# Altium PCB TempPCB.PcbDoc
Units mil, origin at the board's own origin, x right, y up, seen from the top; angles counter-clockwise.
Board outline 2285 x 1133.39 mil, 2 copper layers (Top Layer, Bottom Layer); 5 components, 7 nets, 31 pads, 0 vias.
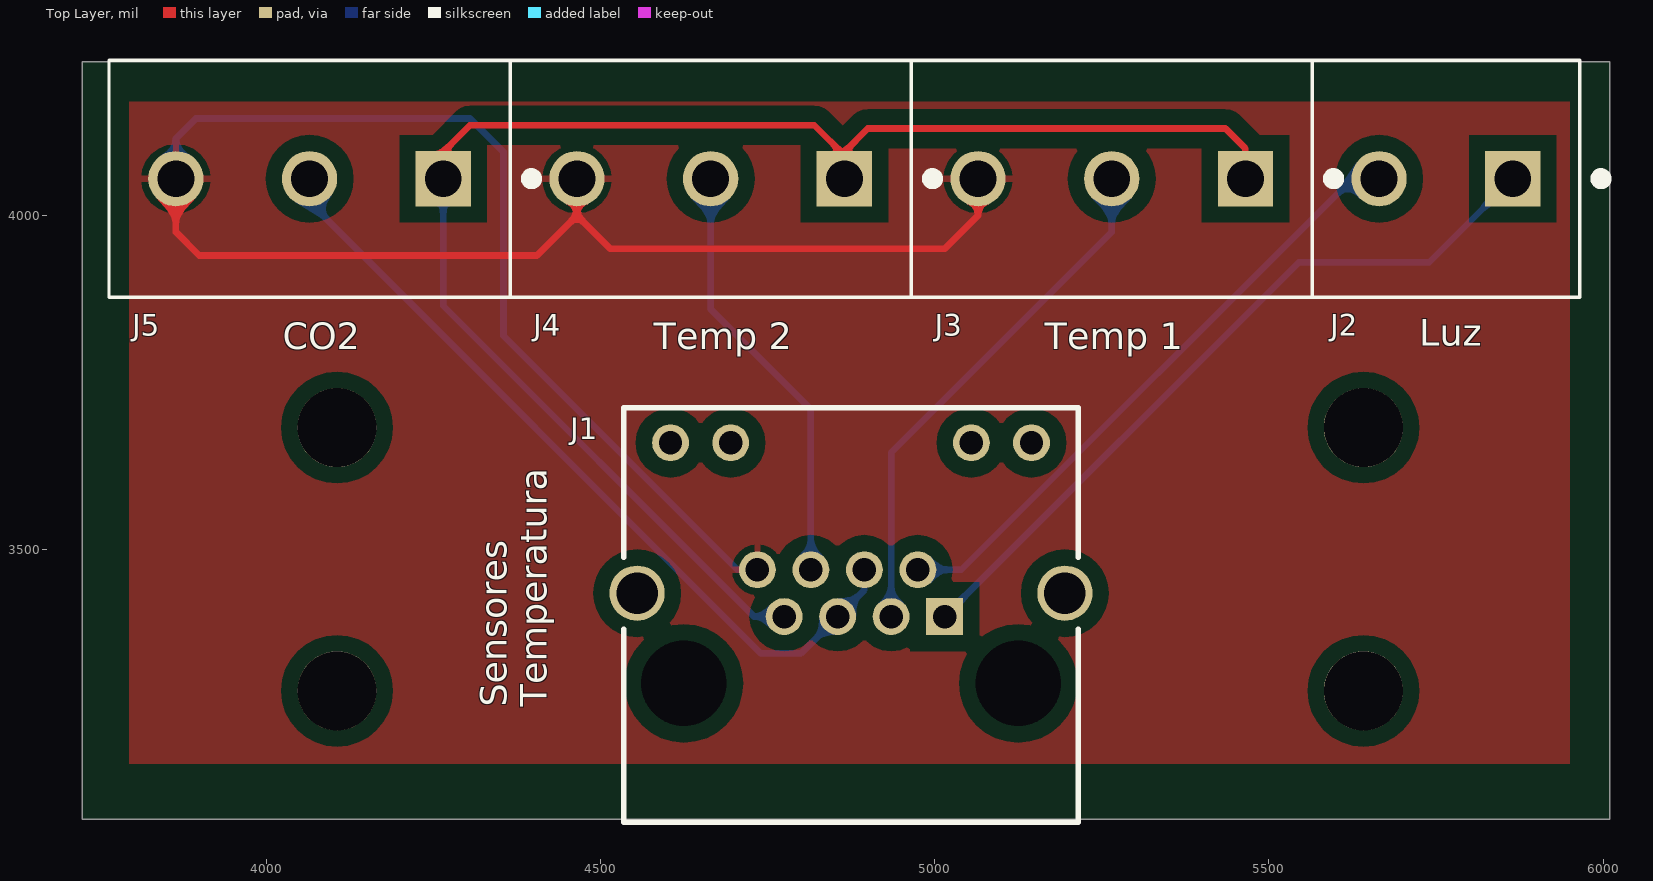
[diagram p0: Top Layer view]
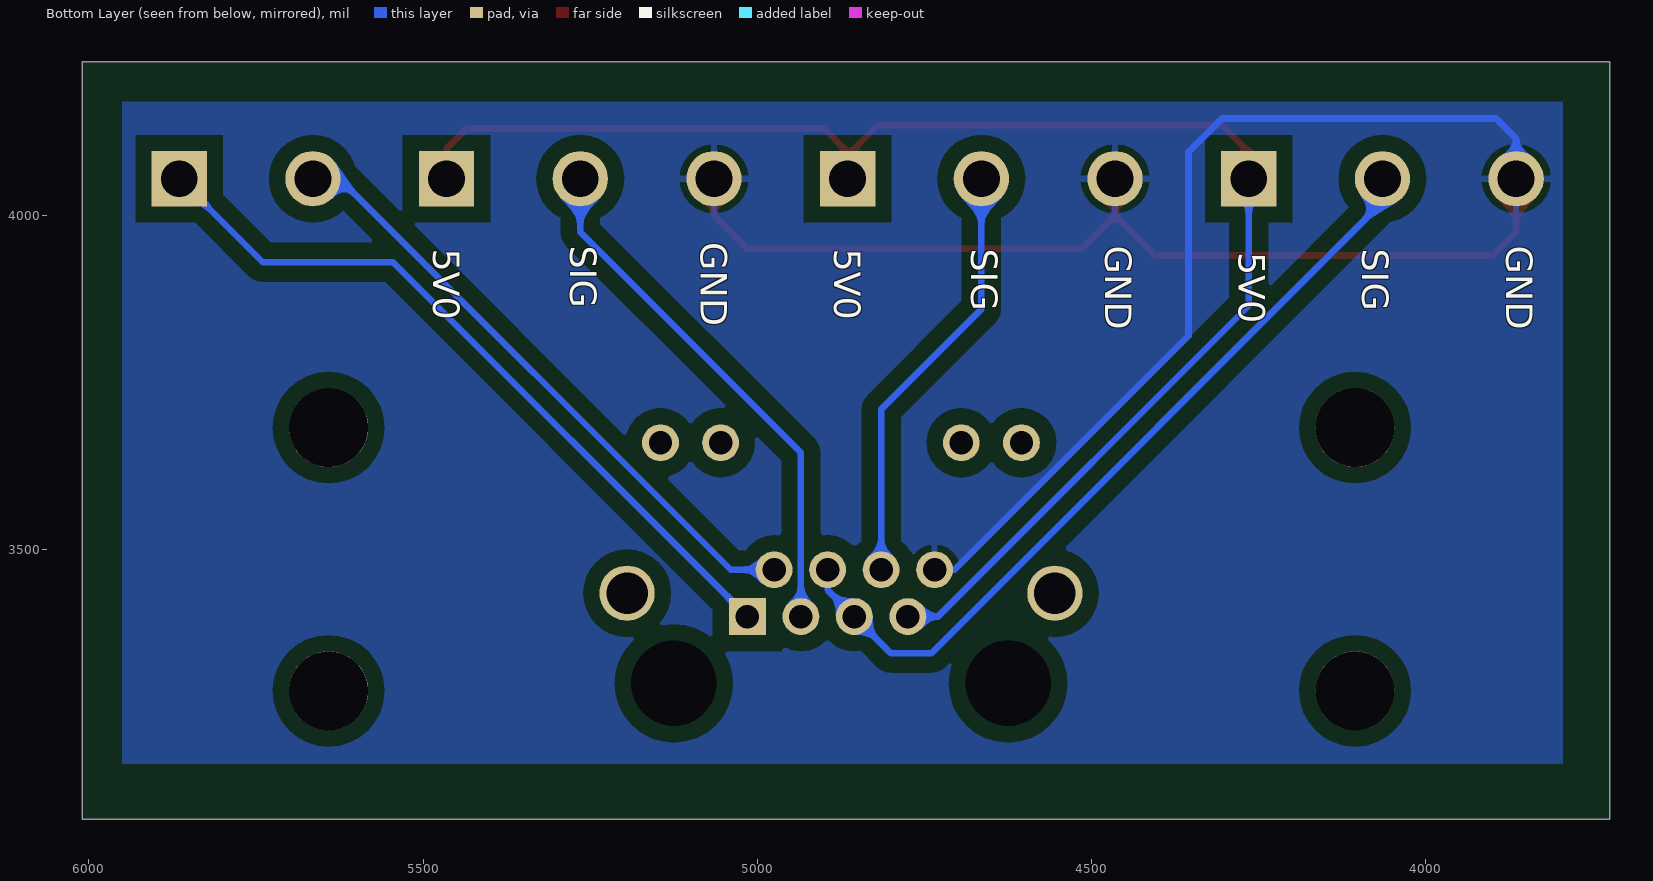
[diagram p1: Bottom Layer view, seen from below]
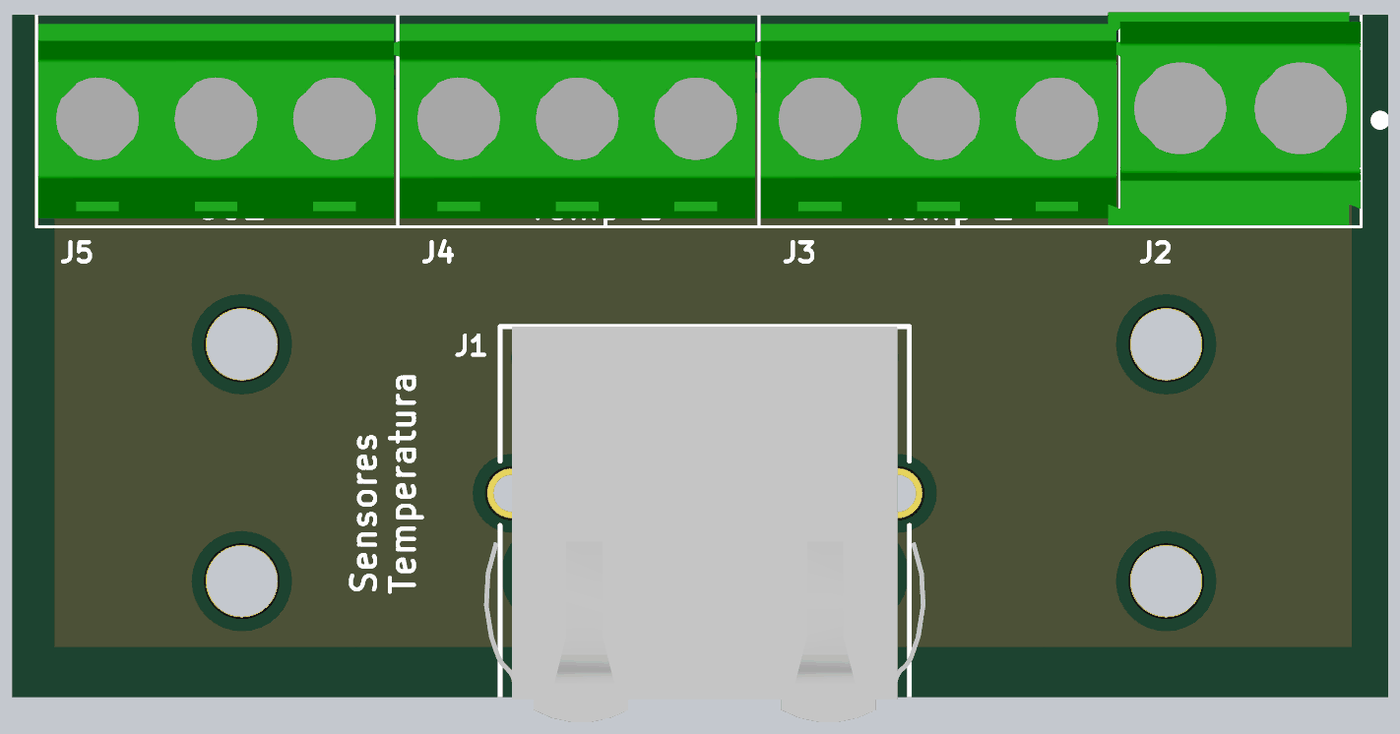
[diagram p2: 3D render of the assembled board from above, using the file's embedded part models]

## Layer stack, top to bottom
Top Solder: solder mask 0.4, Solder Resist, Dk 3.5
Top Layer: signal copper 1.4
Dielectric 1: dielectric 12.6, FR-4, Dk 4.8
Bottom Layer: signal copper 1.4
Bottom Solder: solder mask 0.4, Solder Resist, Dk 3.5

## Board outline
3725,3096.61 3725,4230 6010,4230 6010,3096.61

## Design rules (kind name [scope] priority, off if disabled: settings)
Clearance [All] p1: gap=6 except(24: Arc-Poly Track-Poly SMDPad-Poly THPad-Poly Via-Poly Fill-Poly Poly-Poly)
DiffPairsRouting [All] p1: maxlimit=10 minlimit=10 mostfreqgap=10 toplayer_minwidth=10 toplayer_maxwidth=15 toplayer_prefwidth=15 bottomlayer_minwidth=10 bottomlayer_maxwidth=15 bottomlayer_prefwidth=15 maxuncoupledlength=500
HoleSize [All] p1: absolutevalues=TRUE maxlimit=300 minlimit=1 maxpercent=80.000 minpercent=20.000
MinimumSolderMaskSliver [All] p1: minsoldermaskwidth=0
PlaneClearance [All] p1: clearance=32
PolygonConnect [All] p1: connectstyle=Relief reliefconductorwidth=10 reliefentries=4 polygonreliefangle="90 Angle" airgapwidth=10
RoutingTopology [All] p1: topology=Daisy_Simple
RoutingVias [All] p1: holewidth=28 width=50 viastyle="Through Hole" minholewidth=28 minwidth=50 maxholewidth=40 maxwidth=60
SilkToSilkClearance [All] p1: silktosilkclearance=0
SilkToSolderMaskClearance [IsPad] p1: minsilkscreentomaskgap=0 clearancetoexposedcopper=TRUE
SolderMaskExpansion SolderMaskExpansion_1 [IsVia] p1: expansion=0 soldermaskfromhole=TRUE
SolderMaskExpansion [All] p2: expansion=4
UnpouredPolygon [All] p1: allowunpoured=TRUE allowshelved=TRUE
Width [All] p1: maxlimit=40 minlimit=8 preferedwidth=16
22 further rules are at their usual default settings.

## Components (designator, comment, footprint, x,y, rotation, side; value= is the part's Value field where it differs from the comment)
J1 "2-406549-1" TECO-2-406549-1_V 4875,3435 r0 top
J2 "282841-2" TE_282841-2 5765,4055 r180 top
J3 "282841-3" TE_282841-3 5265,4055 r180 top
J4 "282841-3" TE_282841-3 4665,4055 r180 top
J5 "282841-3" TE_282841-3 4065,4055 r180 top

## Footprints (in the part's own frame and the unit in brackets; to place one, negate y for a bottom-side part, rotate by r counter-clockwise, add the part's x,y. Pads: shape width x height; smd on the part's side, far side on the other; paste and mask are expansions set on the pad)
TE_282841-2 [mm]
  rect 2.1x2.1 hole 1.4: 1(-2.54,0)
  round 2.1 hole 1.4: 2(2.54,0)
  silkscreen extent -6.09,-4.5 5.08,4.5, body extent -5.08,-4.55 5.58,4.45, height 15.21
TE_282841-3 [mm]
  rect 2.1x2.1 hole 1.4: 1(-5.08,0)
  round 2.1 hole 1.4: 2(0,0) 3(5.08,0)
  silkscreen extent -8.63,-4.5 7.62,4.5, body extent -8.05,-4.06 7.55,4.14, height 10.01
TECO-2-406549-1_V [mm] "Connector, 12-Leads, Body 17.27x15.75mm, Pitch 1.016mm"
  rect 1.4x1.4 hole 0.89: 1(3.556,-0.889)
  round 1.4 hole 0.89: 2(2.54,0.889) 3(1.524,-0.889) 4(0.508,0.889) 5(-0.508,-0.889) 6(-1.524,0.889) 7(-2.54,-0.889) 8(-3.556,0.889) 9(-4.572,5.715) 10(-6.858,5.715) 11(6.858,5.715) 12(4.572,5.715)
  round 0 hole 3.251 unplated: MH1(6.35,-3.429) MH2(-6.35,-3.429)
  round 2.1 hole 1.575: S1(8.128,0) S2(-8.128,0)
  silkscreen extent -8.63,-8.71 8.64,7.04, body extent -9.32,-9.68 9.32,7.04, height 14.61

## Part data
J1: library part CMP-2000-05541-1, "RJ45 Connector, Pitch 1.016 mm, 8 Position, Height 14.22 mm, Tail Length 3.18 mm, RoHS, Tray"
J2: "Conn Terminal Block 2 POS 5.08mm Solder ST Thru-Hole 17.5A/Contact"
J3 J4 J5: "Conn Terminal Block 3 POS 5.08mm Solder ST Thru-Hole 17.5A/Contact"

## Free pads (board coordinates)
  round 118.11 hole 118.11: ""(4106.06,3288.9) ""(4106.06,3682.6) ""(5641.5,3288.9) ""(5641.5,3682.6)

## Nets (pads, with @x,y where several pads share a name; then routed paths per layer and width w, separated by ;. In a path a pad name is that pad's centre, name@x,y a point inside that pad or via, vN(x,y) a via of type N, cw(c..) or ccw(c..) an arc to the next point about the centre after c; other vN are vias at no path point)
5V0: J1.7 J3.1 J4.1 J5.1 | length 2279.7
  Top Layer w10: J5.1 4265,4095 4305,4135 4820,4135 J4.1@4865,4090 ; J4.1 J4.1@4865,4090 ; J3.1 5465,4100 5435,4130 4900,4130 4865,4095 J4.1@4865,4090
  Bottom Layer w10: J5.1 4265,3865 4730,3400 J1.7
B_PORT: J1.4 J1.5 J5.2 | length 1213.9
  Bottom Layer w10: J5.2 4065,4020 4740,3345 4800,3345 J1.5 4895,3440 J1.4
GND: J1.8 J3.3 J4.3 J5.3 | length 2853.9
  Top Layer w10: J5.3 3865,3975 3900,3940 4405,3940 4465,4000 ; J4.3 4465,4000 ; J3.3 5065,4000 5015,3950 4515,3950 4465,4000
  Bottom Layer w10: J5.3 3865,4115 3895,4145 4305,4145 4355,4095 4355,3820 4705,3470 J1.8
L_IN_N: J1.2 J2.2 | length 932.3
  Bottom Layer w10: J1.2 5040,3470 5625,4055 J2.2
L_IN_P: J1.1 J2.1 | length 1121.3
  Bottom Layer w10: J1.1 5545,3930 5740,3930 J2.1
ONE_WIRE_1: J1.3 J3.2 | length 791.7
  Bottom Layer w10: J1.3 4935,3645 5265,3975 J3.2
ONE_WIRE_2: J1.6 J4.2 | length 647.1
  Bottom Layer w10: J4.2 4665,3860 4815,3710 J1.6
pads on no net: J1.9 J1.10 J1.11 J1.12 J1.MH1 J1.MH2 J1.S1 J1.S2

## Polygon pours and split planes (outlines as drawn)
GND on Top Layer "GroundPlaneT" (solid, pour order 0): 3795,4170 5950,4170 5950,3175 5950,3180 3795,3180
GND on Bottom Layer "GroundPlaneT" (solid, pour order 2): 3795,4170 3795,3180 5950,3180 5950,4170

## Silkscreen, mask and mechanical layers (free items; w line width, h text height)
Top Overlay:
  text "Luz" at 5725,3805 h40
  text "CO2" at 4025,3800 h40
  text "Temp 2" at 4580,3800 h40
  text "Temp 1" at 5165,3800 h40
  text "Sensores / Temperatura" at 4420,3265 h40 r90
Bottom Overlay:
  text "GND" at 5085,3960 h40 r90
  text "GND" at 3880,3955 h40 r90
  text "GND" at 4480,3955 h40 r90
  text "SIG" at 5280,3955 h40 r90
  text "SIG" at 4095,3950 h40 r90
  text "SIG" at 4680,3950 h40 r90
  text "5V0" at 4885,3950 h40 r90
  text "5V0" at 5485,3950 h40 r90
  text "5V0" at 4280,3945 h40 r90
Mechanical 1:
  the board outline again, w6

## Dimensions
3725,4230 to 6010,4230 on Mechanical 13
6010,4230 to 6010,3096.61 on Mechanical 13
4106.06,3288.9 to 3725,3096.61 on Mechanical 13
4106.06,3288.9 to 5641.5,3288.9 on Mechanical 13
4106.06,3288.9 to 3725,3096.61 on Mechanical 13
4106.06,3288.9 to 4106.06,3682.6 on Mechanical 13